# EAGLE schematic esp8266 (EAGLE 9.1.0)
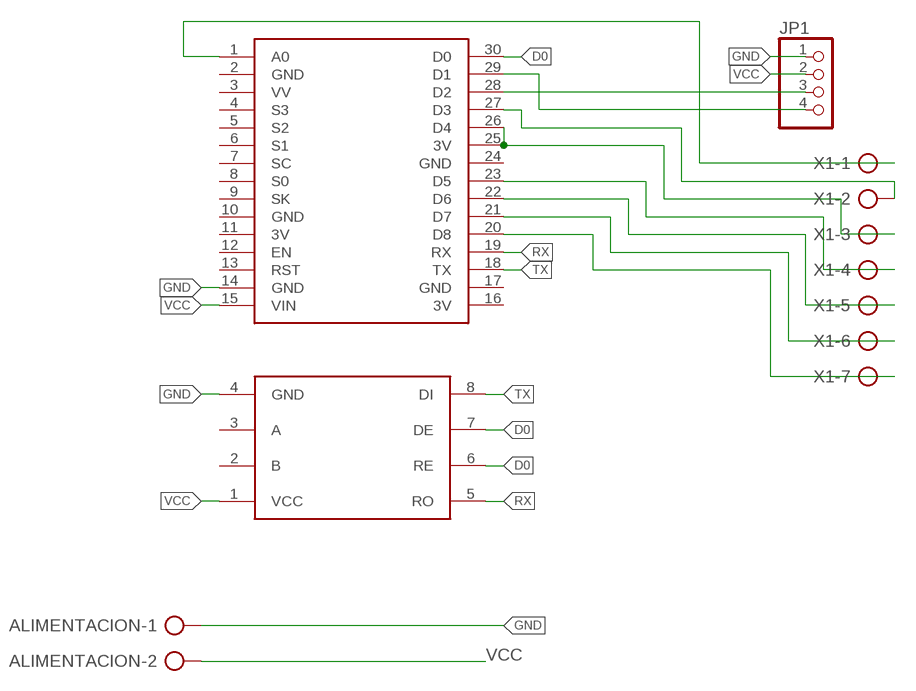
[diagram p0: schematic, sheet 1]

## Parts
ALIMENTACION  AK300/2  [AK300/2]
JP1  PINHD-1X4  [1X04]
U$1  RS485DEVICE  [1X01]
U$2  NODEMCU  [NODEMCU]
X1  AK300/7  [AK300/7]

## Nets
D0: U$1.6(RE) U$1.7(DE) U$2.30(D0)
GND: ALIMENTACION.1 JP1.1 U$1.4(GND) U$2.14(GND)
N$1: JP1.3 U$2.28(D2)
N$2: JP1.4 U$2.29(D1)
N$5: U$2.1(A0) X1.1
N$6: U$2.27(D3) X1.2
N$7: U$2.25(3V) U$2.26(D4) X1.3
N$8: U$2.23(D5) X1.4
N$9: U$2.22(D6) X1.5
N$10: U$2.21(D7) X1.6
N$11: U$2.20(D8) X1.7
RX: U$1.5(RO) U$2.19(RX)
TX: U$1.8(DI) U$2.18(TX)
VCC: ALIMENTACION.2 JP1.2 U$1.1(VCC) U$2.15(VIN)
Unconnected: U$1.2(B) U$1.3(A) U$2.3(VV) U$2.4(S3) U$2.5(S2) U$2.6(S1) U$2.7(SC) U$2.8(S0) U$2.9(SK) U$2.12(EN) U$2.13(RST)

## Power pins joined to a net without a drawn wire
3V: U$2.11(3V) U$2.16(3V)
GND: U$2.2(GND) U$2.10(GND) U$2.17(GND) U$2.24(GND)

## Library data of the parts
ALIMENTACION = con-ptr500:AK300/2: CONNECTOR; OC_FARNELL: unknown; OC_NEWARK: unknown
JP1 = pinhead:PINHD-1X4: PIN HEADER
U$1 = Rs485lbr:RS485DEVICE
U$2 = nodemcu:NODEMCU
X1 = con-ptr500:AK300/7: CONNECTOR; OC_FARNELL: unknown; OC_NEWARK: unknown